# EAGLE board smokoino (EAGLE 7.5.0)
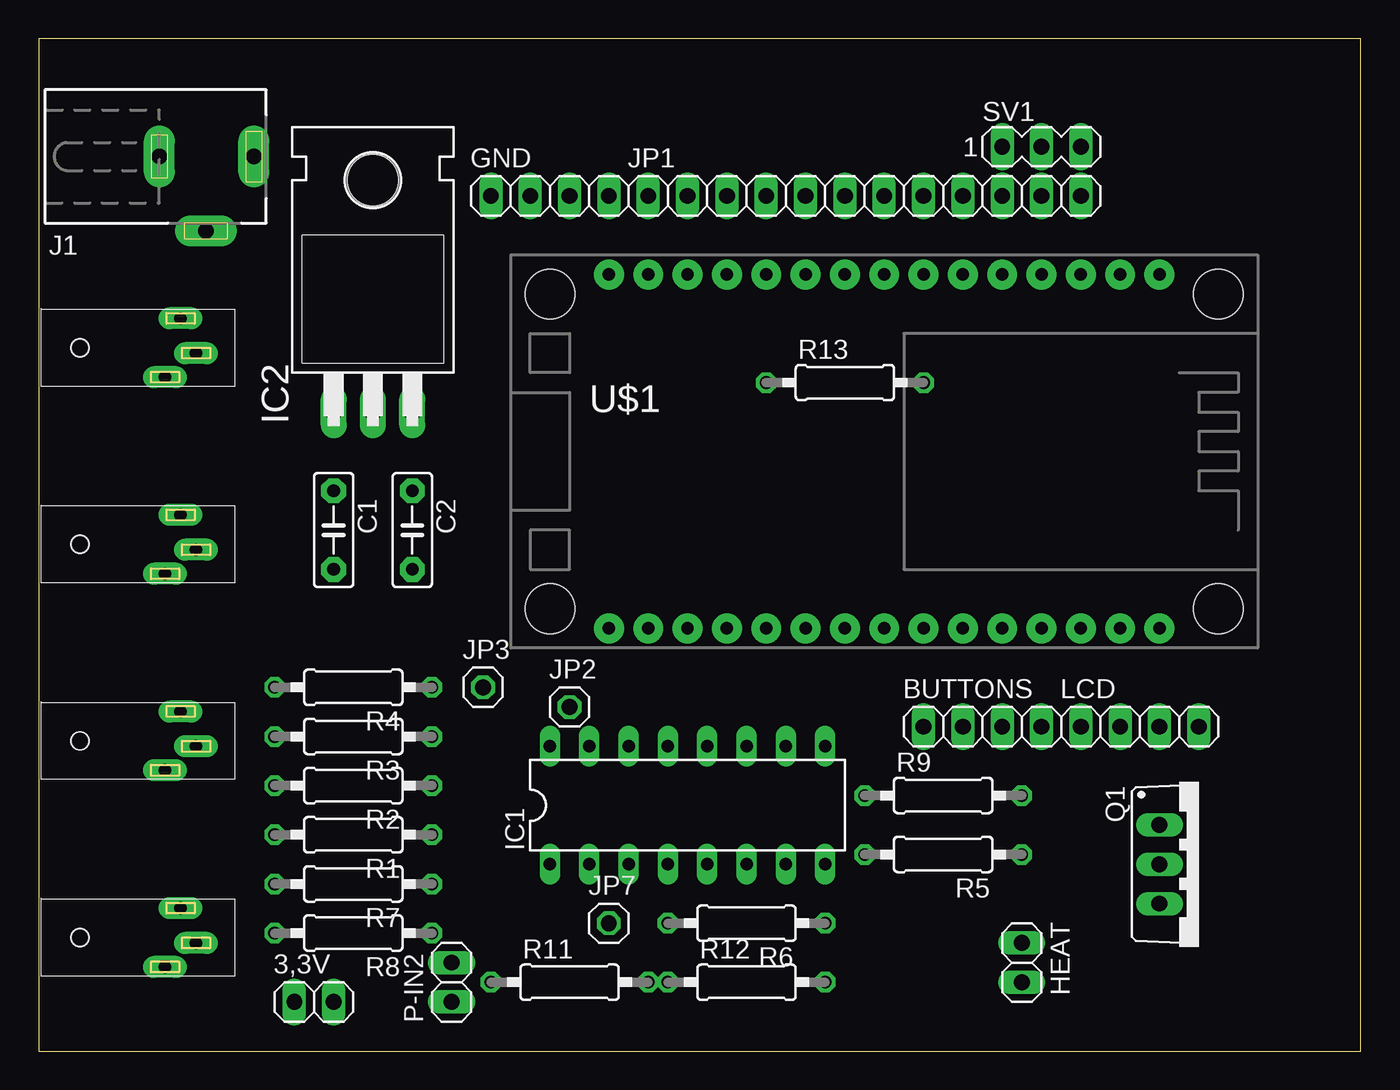
[diagram p0: board, top side]
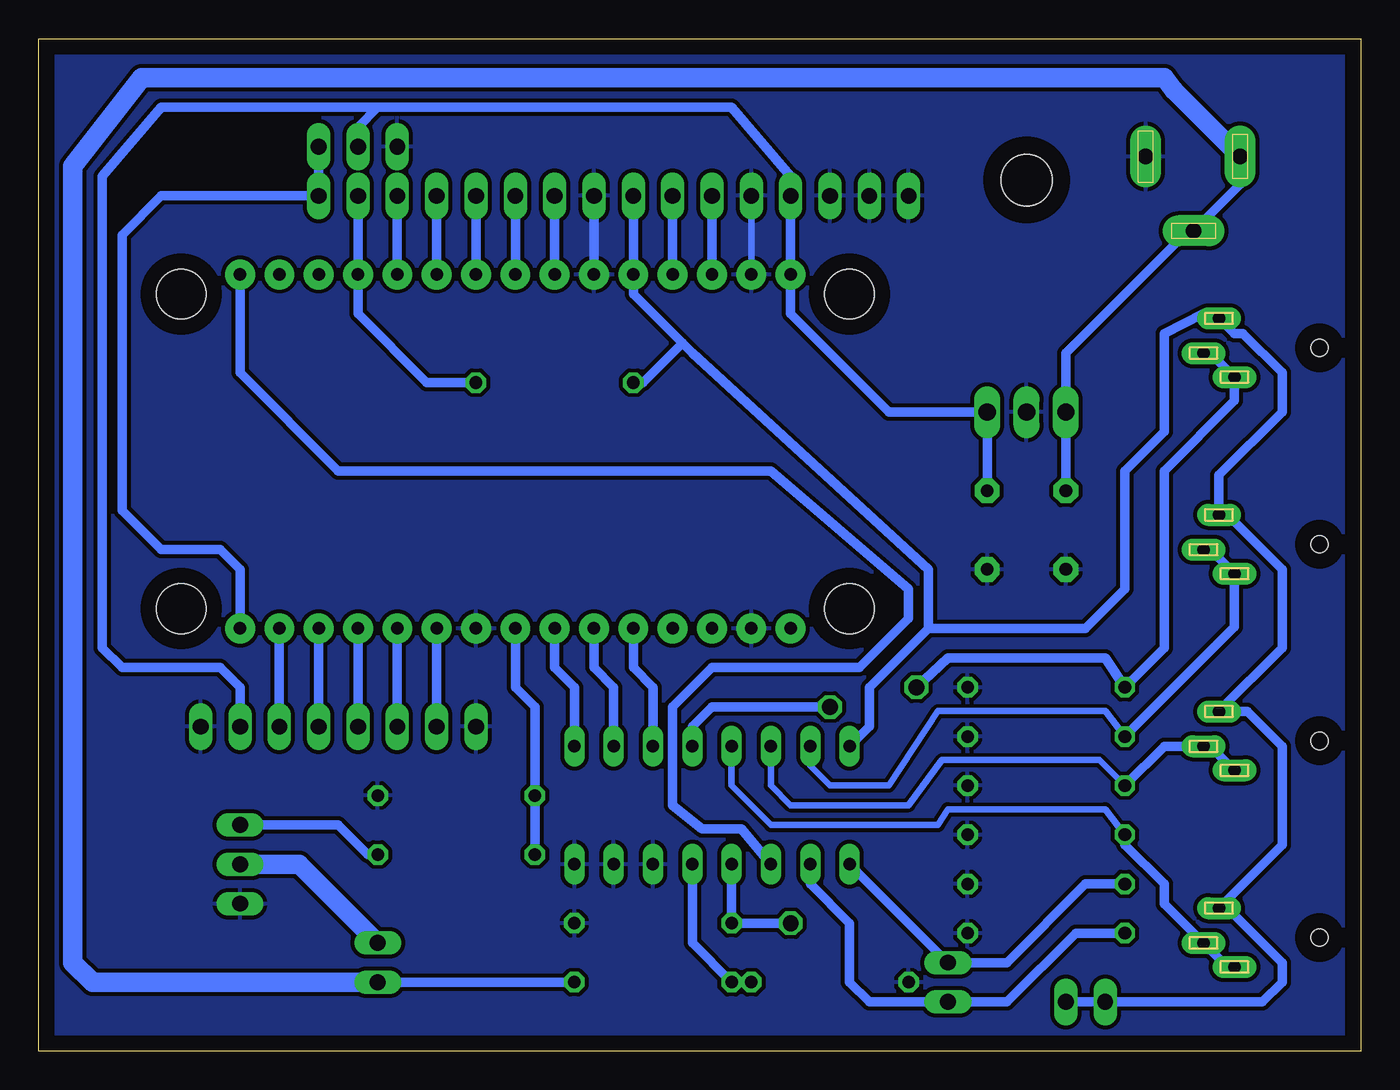
[diagram p1: board, bottom side, seen from below]

Size 85.39 x 65.39 mm. Coordinates in mm from the lower left corner, seen from the top.
Outline: 0,0 85.39,0 85.39,65.39 0,65.39 0,0
Copper layers (1*16): Top 0.035mm / dielectric 1.5mm / Bottom 0.035mm
Design rules "default": minimum track width 10mil, minimum drill 24mil, track to track 8mil, track to pad 8mil, pad to pad 8mil, via to via 8mil, smd to smd 8mil, copper to edge 40mil, drill to drill 8mil, minimum pad ring 10mil, minimum via ring 8mil, stop-mask expansion 4mil, vias tented up to drill 0mil, thermal gap 10mil

## Footprints (pad centres in the part's own frame; a part is rotated, then mirrored left to right if it is on the bottom)
1X02 = drill 1.016 long: 1 -1.27,0; 2 1.27,0
1X04 = drill 1.016 long: 1 -3.81,0; 2 -1.27,0; 3 1.27,0; 4 3.81,0
C5B2.5 = drill 0.813 pad 1.6 octagon: 1 -2.54,0; 2 2.54,0
DIL16 = drill 0.813 long: 1 -8.89,-3.81; 2 -6.35,-3.81; 3 -3.81,-3.81; 4 -1.27,-3.81; 5 1.27,-3.81; 6 3.81,-3.81; 7 6.35,-3.81; 8 8.89,-3.81; 9 8.89,3.81; 10 6.35,3.81; 11 3.81,3.81; 12 1.27,3.81; 13 -1.27,3.81; 14 -3.81,3.81; 15 -6.35,3.81; 16 -8.89,3.81
TO220H = drill 1.118 long: 1 -2.54,-10.16; 2 0,-10.16; 3 2.54,-10.16 | hole 3.302: 0,4.826
DCJ0303 = drill 1 pad 2 long: 1 0,3.1; 2 4.8,0; 3 0,-3
1X12 = drill 1.016 long: 1 -13.97,0; 2 -11.43,0; 3 -8.89,0; 4 -6.35,0; 5 -3.81,0; 6 -1.27,0; 7 1.27,0; 8 3.81,0; 9 6.35,0; 10 8.89,0; 11 11.43,0; 12 13.97,0
1X01 = drill 1.016 octagon: 1 0,0
TO220BV = drill 1.016 long: D 0,-2.54; G -2.54,-2.54; S 2.54,-2.54
0207/10 = drill 0.813 octagon: 1 -5.08,0; 2 5.08,0
MA03-1 = drill 1.016 long: 1 -2.54,0; 2 0,0; 3 2.54,0
ESP12E_DEVKIT = drill 0.8 pad 1.93: 3V3@0 -11.43,-7.62; 3V3@1 11.43,5.08; 3V3@2 11.43,-17.78; AD0 -11.43,17.78; CLK -11.43,-2.54; CMD -11.43,2.54; D0 11.43,17.78; D1 11.43,15.24; D2 11.43,12.7; D3 11.43,10.16; D4 11.43,7.62; D5 11.43,0; D6 11.43,-2.54; D7 11.43,-5.08; D8 11.43,-7.62; EN -11.43,-10.16; GND@0 -11.43,-5.08; GND@1 -11.43,-15.24; GND@2 11.43,2.54; GND@3 11.43,-15.24; RST -11.43,-12.7; RSV@0 -11.43,15.24; RSV@1 -11.43,12.7; RX 11.43,-10.16; SD0 -11.43,0; SD1 -11.43,5.08; SD2 -11.43,7.62; SD3 -11.43,10.16; TX 11.43,-12.7; VIN -11.43,-17.78 | hole 3.2: -10.16,21.59; 10.16,21.59; 10.16,-21.59; -10.16,-21.59
JACK_2_5 = drill 0.8 pad 1.422 long: 1 -1,2.25; 2 -2,-1.55; 3 0,0 | hole 1.1: -7.5,0.35

## Placement (x,y rotation side)
3,3V  [1X02]  17.78,3.17 0 top
BUTTONS  [1X04]  60.96,20.96 0 top
C1  0,33uF  [C5B2.5]  19.05,33.66 270 top
C2  0,1uF  [C5B2.5]  24.13,33.66 270 top
GND  [1X04]  33.02,55.24 0 top
HEAT  [1X02]  63.5,5.71 270 top
IC1  4051N  [DIL16]  41.91,15.88 0 top
IC2  7805T  [TO220H]  21.59,51.44 0 top
J1  [DCJ0303]  10.8,57.78 270 top
JP1  [1X12]  53.34,55.24 0 top
JP2  [1X01]  34.29,22.23 0 top
JP3  [1X01]  28.7,23.5 0 top
JP7  [1X01]  36.83,8.25 0 top
LCD  [1X04]  71.12,20.96 0 top
P-IN2  [1X02]  26.67,4.44 90 top
Q1  STP36NF06L  [TO220BV]  74.93,12.07 270 top
R1  47k  [0207/10]  20.32,13.97 180 top
R2  47k  [0207/10]  20.32,17.14 180 top
R3  47k  [0207/10]  20.32,20.32 180 top
R4  47k  [0207/10]  20.32,23.5 180 top
R5  560  [0207/10]  58.42,12.7 180 top
R6  47k  [0207/10]  45.72,8.25 180 top
R7  47k  [0207/10]  20.32,10.8 180 top
R8  47k  [0207/10]  20.32,7.62 180 top
R9  10k  [0207/10]  58.42,16.51 0 top
R11  1k  [0207/10]  34.29,4.44 0 top
R12  4k7  [0207/10]  45.72,4.44 0 top
R13  4700  [0207/10]  52.07,43.18 0 top
SV1  [MA03-1]  64.77,58.42 0 top
U$1  ESP12E_DEVKIT  [ESP12E_DEVKIT]  54.61,38.73 270 top
U$3  JACK_2_5  [JACK_2_5]  10.16,6.99 0 top
U$4  JACK_2_5  [JACK_2_5]  10.16,19.69 0 top
U$5  JACK_2_5  [JACK_2_5]  10.16,32.38 0 top
U$6  JACK_2_5  [JACK_2_5]  10.16,45.09 0 top

## Library data of the parts
3,3V BUTTONS GND HEAT JP1-JP3 JP7 LCD P-IN2 = pinhead
C1 C2 = capacitor-wima
IC1 = 40xx
IC2 = linear
J1 = con-jack; OC_FARNELL: unknown; OC_NEWARK: unknown
Q1 = transistor-power
R1-R9 R11-R13 = rcl
SV1 = con-lstb; OC_FARNELL: unknown; OC_NEWARK: unknown
U$1 = ESP12E_DEVKIT
U$3-U$6 = 2_5mm_jack

## Nets
4051: IC1.4 JP7.1 R6.2
+3V3: 3,3V.1 3,3V.2 IC1.16 JP1.4 R13.1 U$1.3V3@0 U$3.1 U$4.1 U$5.1 U$6.1
+5V: C2.1 GND.4 IC2.3 LCD.3 SV1.2 U$1.VIN
+12V: C1.1 HEAT.2 IC2.1 J1.2 J1.3 R12.2
GND: BUTTONS.1 C1.2 C2.2 GND.1 GND.2 GND.3 IC1.6 IC1.7 IC1.8 IC2.2 J1.1 JP1.1 JP1.5 LCD.4 Q1.S R1.1 R2.1 R3.1 R4.1 R6.1 R7.1 R8.1 R9.2 R11.1 SV1.1 U$1.GND@0 U$1.GND@1 U$1.GND@2 U$1.GND@3
N$1: IC1.9 U$1.D6
N$2: IC1.10 U$1.D7
N$3: IC1.11 U$1.D8
N$4: IC1.3 U$1.AD0
N$5: IC1.13 R1.2 U$3.2 U$3.3
N$6: IC1.14 R2.2 U$4.2 U$4.3
N$7: BUTTONS.4 U$1.D3
N$8: BUTTONS.3 U$1.D4
N$9: LCD.1 U$1.D2
N$10: LCD.2 U$1.D1
N$11: IC1.15 R3.2 U$5.2 U$5.3
N$12: IC1.5 R11.2 R12.1
N$13: JP1.10 U$1.SD2
N$14: IC1.12 JP2.1
N$16: IC1.2 P-IN2.1 R8.2
N$17: R5.2 R9.1 U$1.D5
N$18: JP1.2 U$1.RST
N$19: JP1.3 U$1.EN
N$20: BUTTONS.2 U$1.3V3@1
N$22: JP1.6 U$1.CLK
N$23: JP1.7 U$1.SD0
N$24: JP1.8 U$1.CMD
N$25: JP1.9 U$1.SD1
N$26: Q1.G R5.1
N$27: JP1.11 R13.2 U$1.SD3
N$28: JP1.12 SV1.3 U$1.D0
N$30: IC1.1 P-IN2.2 R7.2
N$40: JP3.1 R4.2 U$6.2 U$6.3
STP36NF06L: HEAT.1 Q1.D

## Tracks (layer width: path | path; a pad name or v marks a point on that pad's centre or on a via)
4051
  Bottom 0.61: JP7.1 R6.2 IC1.4
+3V3
  Bottom 0.61: 27.94,27.3 27.94,31.12 43.18,45.09 43.81,45.72 | 43.81,45.72 46.99,48.9 U$1.3V3@0 JP1.4 | 27.94,27.3 31.75,23.5 31.75,20.96 IC1.16 | 27.94,27.3 17.78,27.3 15.24,29.84 15.24,37.47 12.7,40.01 12.7,46.36 10.16,47.62 9.45,47.62 U$6.1 8.18,46.36 7.62,46.36 5.08,43.81 5.08,41.27 9.16,37.2 U$5.1 8.6,34.63 5.08,31.12 5.08,26.04 9.16,21.96 U$4.1 7.33,21.94 5.08,19.69 5.08,13.34 8.89,9.53 8.89,9.5 U$3.1 8.6,9.23 5.08,5.71 5.08,4.44 6.35,3.17 3,3V.1 3,3V.2 | R13.1 46.36,43.18 43.81,45.72
+5V
  Bottom 0.61: 63.5,60.96 77.47,60.96 81.28,56.52 81.28,26.04 80.01,24.77 73.66,24.77 72.39,23.5 LCD.3 | 63.5,60.96 40.64,60.96 36.83,56.52 GND.4 U$1.VIN 36.83,47.62 30.48,41.27 IC2.3 C2.1 | SV1.2 64.77,59.69 63.5,60.96
+12V
  Bottom 0.61: HEAT.2 R12.2 | C1.1 IC2.1 19.05,45.09 11.15,52.98 J1.2 7.8,55.98 J1.3
  Bottom 1.27: HEAT.2 81.91,4.44 83.19,5.71 83.19,57.15 78.74,62.86 12.7,62.86 12.06,62.06 J1.3
GND
  Bottom 0.406: JP1.1 U$1.GND@1
  Bottom 0.61: JP1.5 U$1.GND@0
  pour Bottom (isolate 0.254): 0,65.41 85.72,65.41 85.72,0 0,0
N$1
  Bottom 0.61: IC1.9 50.8,23.5 52.07,24.77 U$1.D6
N$2
  Bottom 0.61: IC1.10 48.26,23.5 49.53,24.77 U$1.D7
N$3
  Bottom 0.61: IC1.11 45.72,23.5 46.99,24.77 U$1.D8
N$4
  Bottom 0.61: U$1.AD0 72.39,43.81 66.04,37.47 38.1,37.47 29.21,29.84 29.21,27.94 32.38,24.77 41.91,24.77 44.45,22.23 44.45,15.88 42.55,14.35 40,14.35 IC1.3
N$5
  Bottom 0.406: IC1.13 40.64,17.14 38.1,14.61 27.3,14.61 26.67,15.62 16.51,15.62 R1.2
  Bottom 0.61: U$3.2 8.61,5.43 U$3.3 12.7,9.53 12.7,10.8 15.24,13.34 R1.2
N$6
  Bottom 0.406: IC1.14 38.1,17.14 36.83,15.88 29.21,15.88 27.05,18.8 16.89,18.8 R2.2
  Bottom 0.61: U$4.2 9.71,19.69 U$4.3 12.7,19.69 R2.2
N$7
  Bottom 0.61: U$1.D3 BUTTONS.4
N$8
  Bottom 0.61: U$1.D4 BUTTONS.3
N$9
  Bottom 0.61: U$1.D2 LCD.1
N$10
  Bottom 0.61: U$1.D1 LCD.2
N$11
  Bottom 0.406: IC1.15 35.56,18.41 34.29,17.14 30.48,17.14 27.3,21.97 16.51,21.97 R3.2
  Bottom 0.61: U$5.3 9.71,32.38 U$5.2 8.16,27.4 R3.2
N$12
  Bottom 0.61: R11.2 R12.1 43.18,6.99 IC1.5
N$13
  Bottom 0.61: JP1.10 U$1.SD2
N$14
  Bottom 0.61: IC1.12 43.18,20.96 41.91,22.23 JP2.1
N$16
  Bottom 0.61: R8.2 18.41,7.62 22.86,3.17 P-IN2.1 31.75,3.17 33.02,4.44 33.02,8.25 35.56,10.8 IC1.2
N$17
  Bottom 0.61: U$1.D5 54.61,23.5 53.34,22.23 R5.2 R9.1
N$18
  Bottom 0.61: JP1.2 U$1.RST
N$19
  Bottom 0.61: JP1.3 U$1.EN
N$20
  Bottom 0.61: U$1.3V3@1 BUTTONS.2
N$22
  Bottom 0.61: JP1.6 U$1.CLK
N$23
  Bottom 0.61: JP1.7 U$1.SD0
N$24
  Bottom 0.61: JP1.8 U$1.CMD
N$25
  Bottom 0.61: JP1.9 U$1.SD1
N$26
  Bottom 0.61: R5.1 64.14,12.7 66.04,14.61 Q1.G
N$27
  Bottom 0.61: JP1.11 U$1.SD3 64.77,47.62 60.33,43.18 R13.2
N$28
  Bottom 0.61: U$1.D0 72.39,31.12 73.66,32.38 77.47,32.38 80.01,34.92 80.01,52.7 77.47,55.24 JP1.12 SV1.3
N$30
  Bottom 0.61: R7.2 17.78,10.8 22.86,5.71 P-IN2.2 IC1.1
N$40
  Bottom 0.61: U$6.3 9.71,45.09 U$6.2 8.16,42.01 12.7,37.47 12.7,26.04 R4.2 16.51,25.4 26.67,25.4 JP3.1
STP36NF06L
  Bottom 1.27: Q1.D 68.58,12.07 HEAT.1